# Altium PCB test_board.PcbDoc
Units mm, origin at the board's own origin, x right, y up, seen from the top; angles counter-clockwise.
Board outline 126.47 x 101.7 mm, 2 copper layers (Top Layer, Bottom Layer), stack 1.584 mm thick; 45 components, 45 nets, 223 pads, 4 vias.
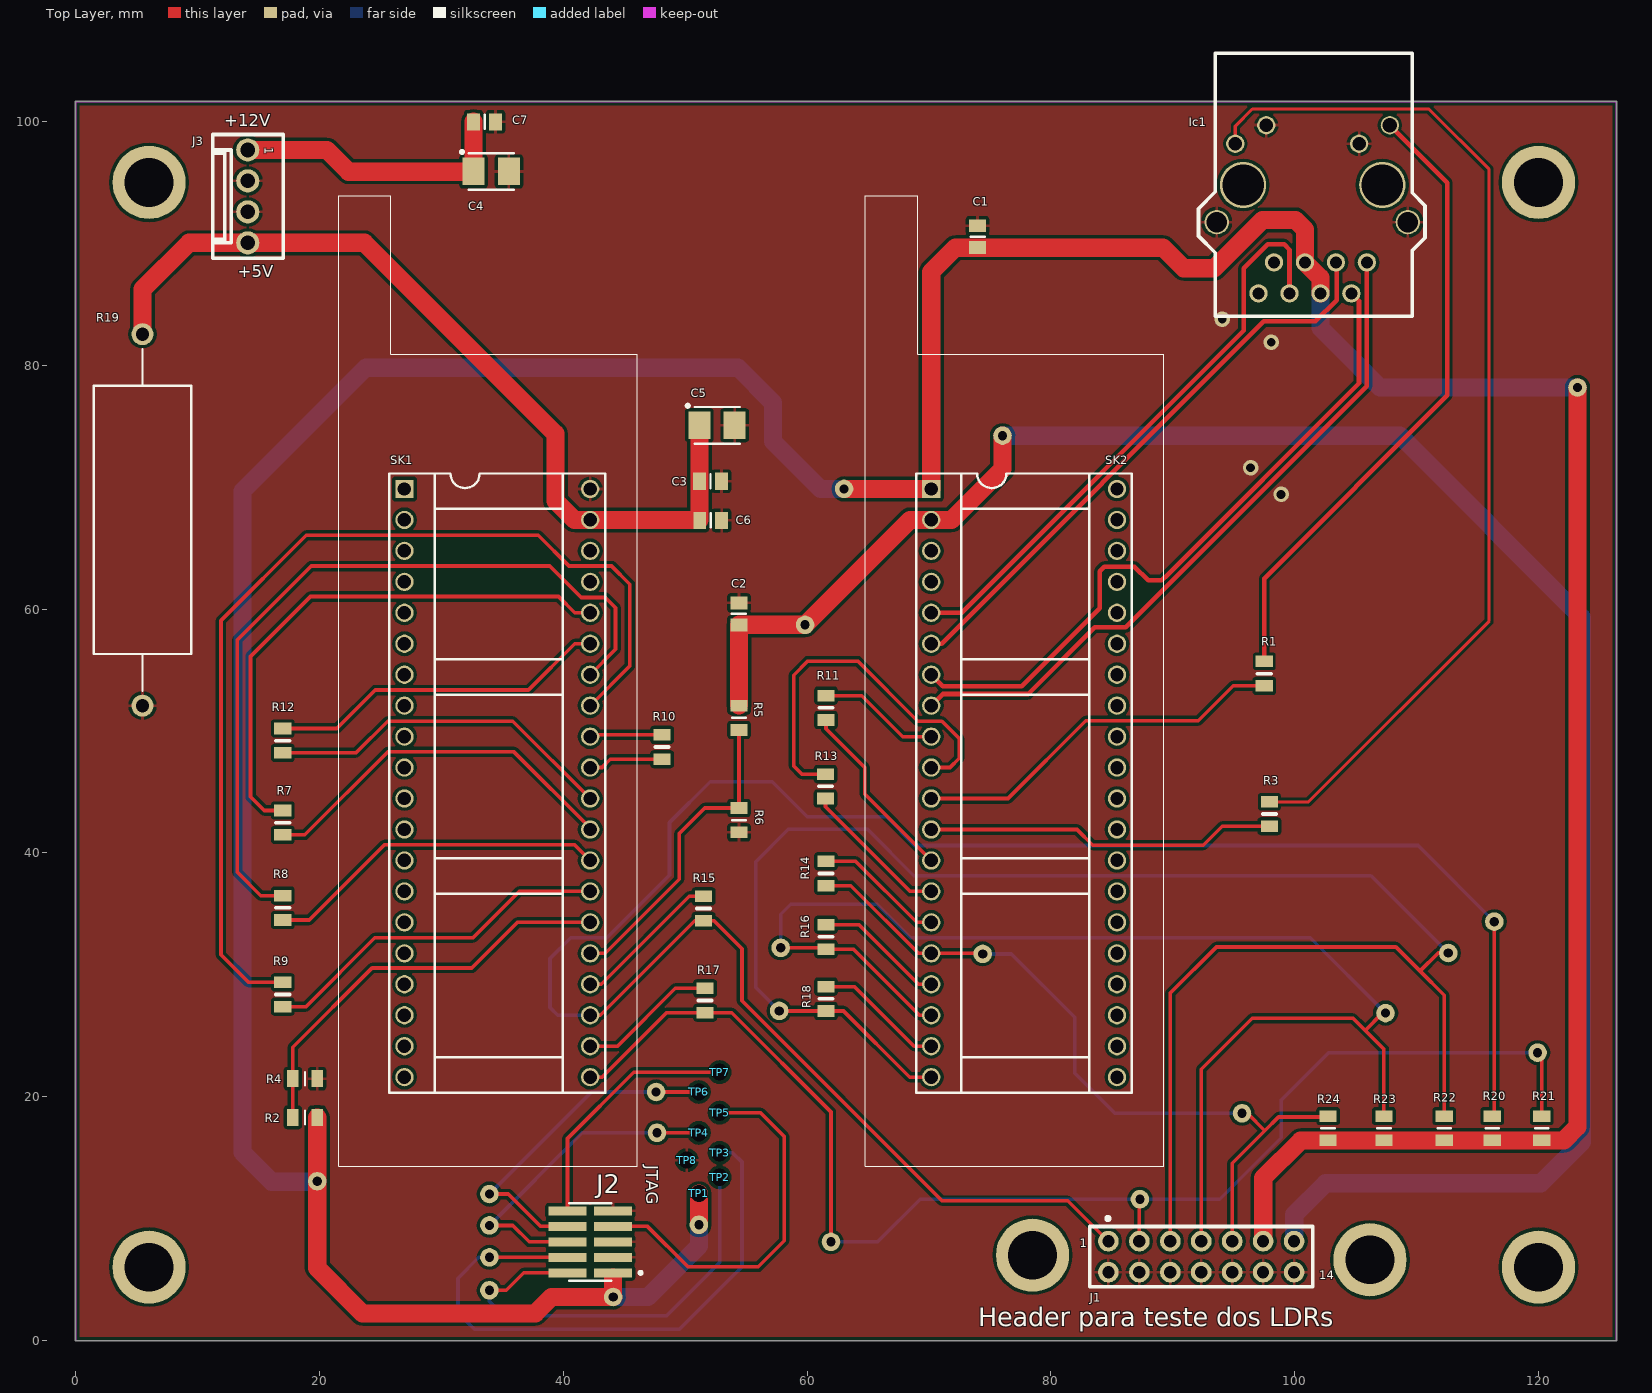
[diagram p0: Top Layer view]
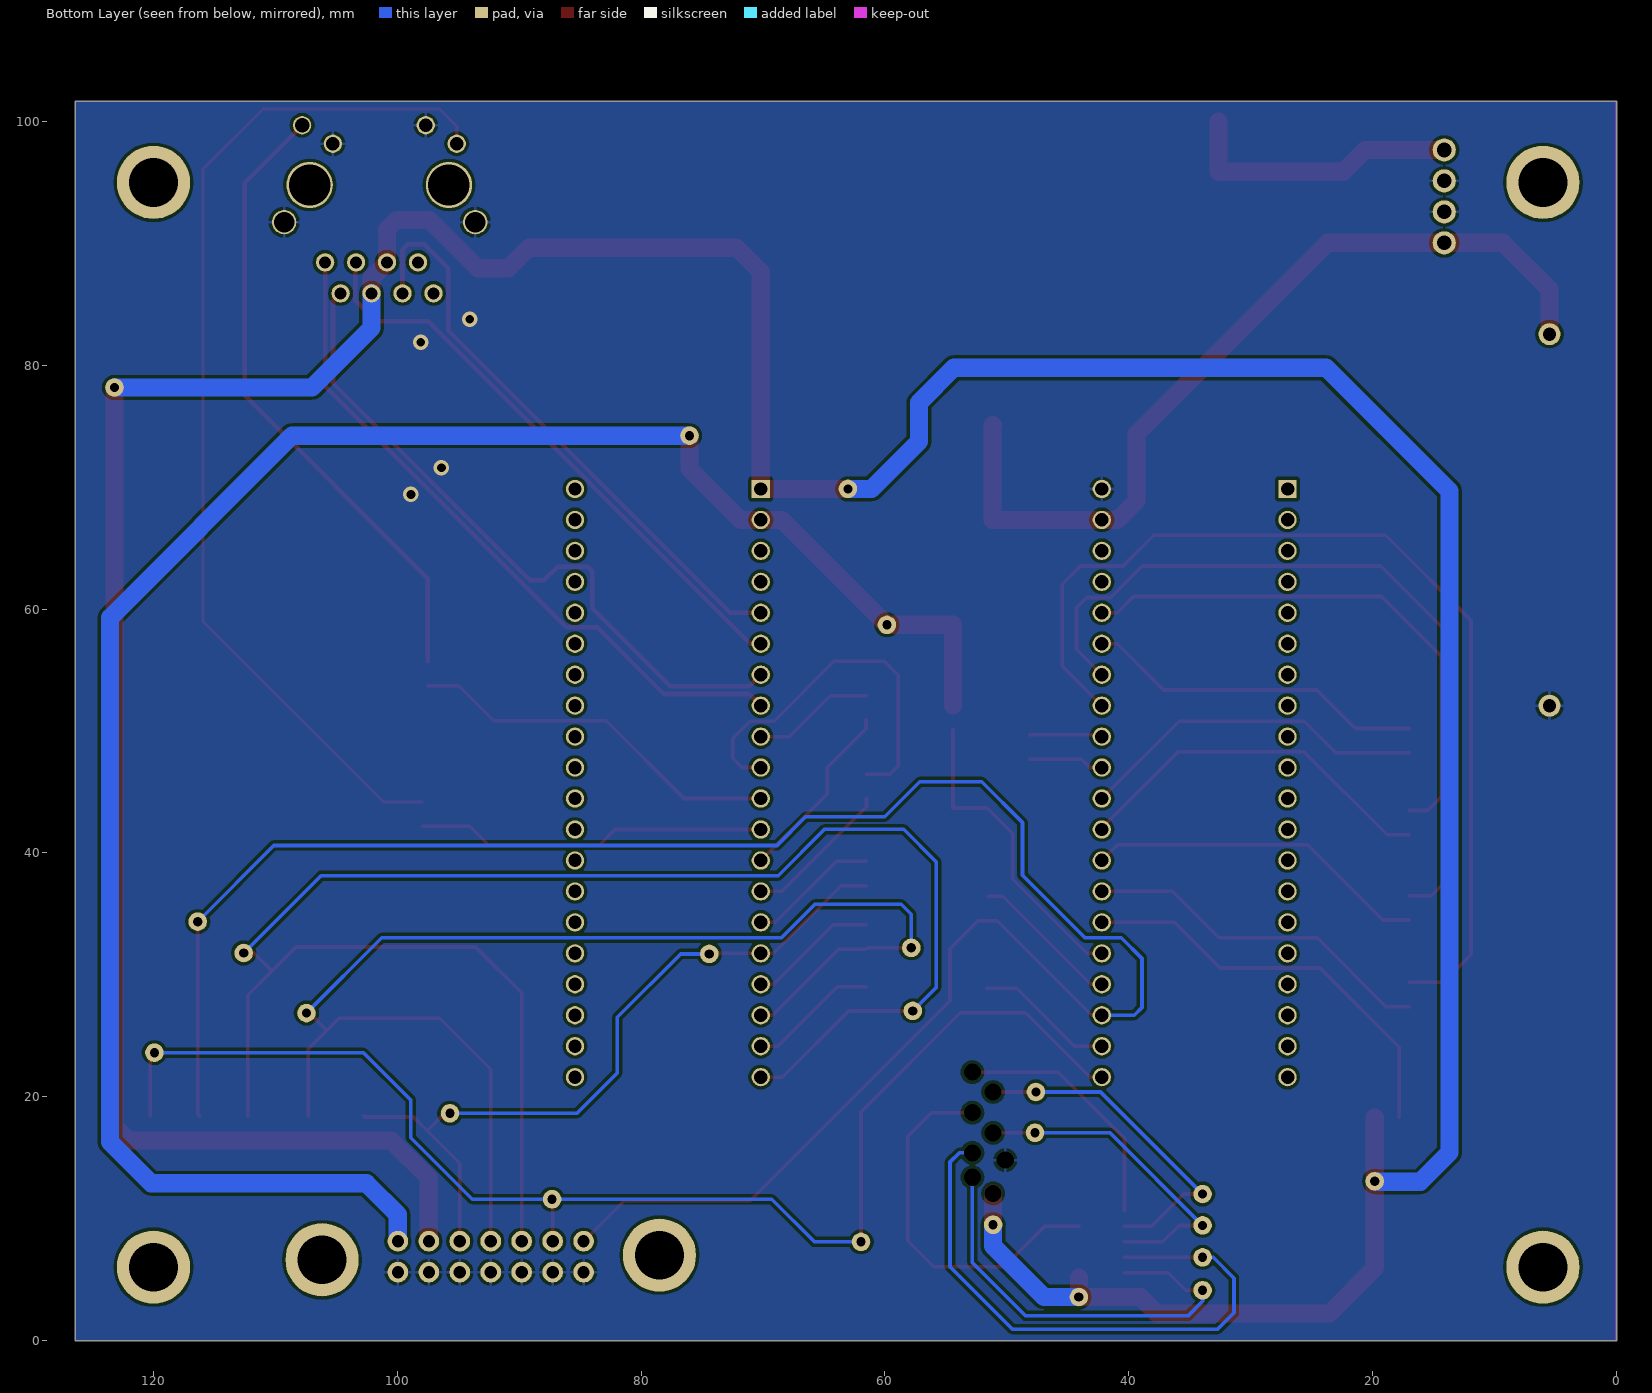
[diagram p1: Bottom Layer view, seen from below]
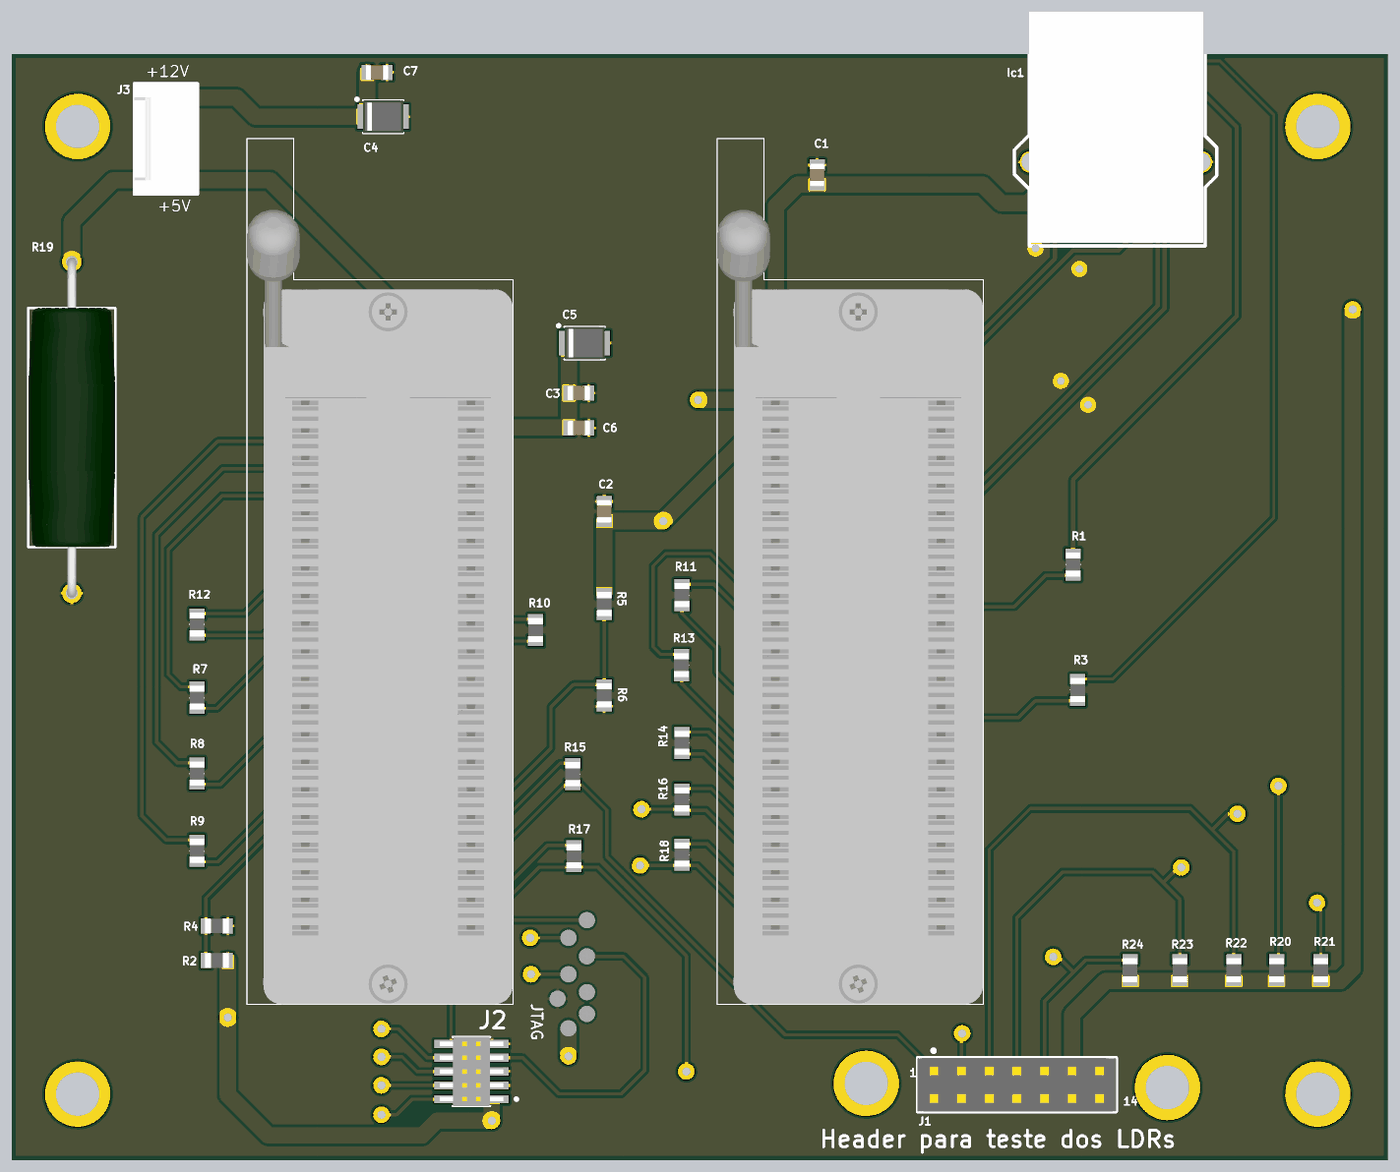
[diagram p2: 3D render of the assembled board from above, using the file's embedded part models]

## Layer stack, top to bottom
Top Solder: solder mask 0.0102, Solder Resist, Dk 3.5
Top Layer: signal copper 0.037
Dielectric 1: core 1.51, FR-4, Dk 4.2
Bottom Layer: signal copper 0.037
Bottom Solder: solder mask 0.0102, Solder Resist, Dk 3.5

## Board outline
-0.05,0 ccw(c0,0) 0,-0.05 126.365,-0.05 ccw(c126.365,0) 126.415,0 126.415,101.6 ccw(c126.365,101.6) 126.365,101.65 0,101.65 ccw(c0,101.6) -0.05,101.6
cut-out: 0,101.6 0,0

## Design rules (kind name [scope] priority, off if disabled: settings)
Clearance [All] p1: gap=0.254 ignorepadtopadclearanceinfootprint=FALSE except(0: Arc-Hole Track-Hole SMDPad-Hole THPad-Hole Via-Hole Fill-Hole Poly-Hole Region-Hole Text-Hole)
HoleSize [All] p1: absolutevalues=TRUE maxlimit=8 minlimit=0.025 maxpercent=80.000 minpercent=20.000
PlaneConnect [All] p1: pad.planeconnectstyle=Relief pad.reliefexpansion=0.508 pad.reliefentries=4 pad.reliefconductorwidth=0.254 pad.reliefairgap=0.254 via.planeconnectstyle=Direct via.reliefexpansion=0.508 via.reliefentries=4 via.reliefconductorwidth=0.254 via.reliefairgap=0.254
PolygonConnect [All] p1: thpad.connectstyle=Relief thpad.reliefconductorwidth=0.254 thpad.reliefentries=4 thpad.polygonreliefangle="90 Angle" thpad.airgapwidth=0.254 smdpad.connectstyle=Relief smdpad.reliefconductorwidth=0.254 smdpad.reliefentries=4 smdpad.polygonreliefangle="90 Angle" smdpad.airgapwidth=0.254 via.connectstyle=Direct via.reliefconductorwidth=0.254 via.reliefentries=4 via.polygonreliefangle="90 Angle" via.airgapwidth=0.254
RoutingVias [All] p1: holewidth=0.711 width=1.27 viastyle="Through Hole" minholewidth=0.711 minwidth=1.27 maxholewidth=0.711 maxwidth=1.27
SilkToSolderMaskClearance [IsPad] p1: minsilkscreentomaskgap=0.1 clearancetoexposedcopper=TRUE
SolderMaskExpansion [All] p1: expansion=0.102
Width [All] p1: maxlimit=4 minlimit=0.254 preferedwidth=0.254 minimp=50.000000 maximp=50.000000 favimp=50.000000
27 further rules are at their usual default settings.

## Components (designator, comment, footprint, x,y, rotation, side; value= is the part's Value field where it differs from the comment)
C1 "10uF" CAPC2012X135N 73.975,90.55 r270 top
C2 "10uF" CAPC2012X135N 54.4,59.6 r270 top
C3 "10uF" CAPC2012X135N 52.067,70.485 r180 top
C4 "47uF" CAPMP3528X210N 34.075,95.9 r0 top
C5 "47uF" CAPMP3528X210N 52.6,75.075 r0 top
C6 "100nF" CAPC2012X135N 52.075,67.275 r180 top
C7 "100nF" CAPC2012X135N 33.525,99.975 r180 top
Ic1 "RJ45" J0006D21BNL 105.918,88.44 r270 top
J1 "Socket 14" SAMTEC_SSW-107-01-G-D 92.329,6.858 r0 top
J2 "Header 10" SAMTEC_FTSH-105-01-L-DV 42.2,8.075 r90 top
J3 "KK®" MOLEX_22-27-2041 14.097,93.853 r270 top
R1 "220" RESC2012X60N 97.5,54.7 r270 top
R2 "1k" RESC2012X60N 18.796,18.288 r180 top
R3 "220" RESC2012X60N 97.925,43.175 r270 top
R4 "1k" RESC2012X60N 18.796,21.463 r180 top
R5 "1k" RESC2012X60N 54.4,51.075 r270 top
R6 "1k" RESC2012X60N 54.4,42.675 r90 top
R7 "1k" RESC2012X60N 16.971,42.468 r90 top
R8 "1k" RESC2012X60N 16.971,35.483 r90 top
R9 "1k" RESC2012X60N 16.971,28.371 r90 top
R10 "1k" RESC2012X60N 48.1,48.675 r90 top
R11 "1k" RESC2012X60N 61.544,51.893 r270 top
R12 "1k" RESC2012X60N 16.971,49.199 r270 top
R13 "1k" RESC2012X60N 61.5,45.45 r90 top
R14 "1k" RESC2012X60N 61.544,38.304 r270 top
R15 "1k" RESC2012X60N 51.5,35.425 r90 top
R16 "1k" RESC2012X60N 61.544,33.097 r270 top
R17 "1k" RESC2012X60N 51.625,27.875 r90 top
R18 "1k" RESC2012X60N 61.544,28.017 r270 top
R19 "5R6" RES_WELWYN_W22 5.461,67.31 r90 top
R20 "330k" RESC2012X60N 116.205,17.399 r90 top
R21 "330k" RESC2012X60N 120.269,17.399 r90 top
R22 "330k" RESC2012X60N 112.268,17.399 r90 top
R23 "330k" RESC2012X60N 107.315,17.399 r90 top
R24 "330k" RESC2012X60N 102.743,17.399 r90 top
SK1 "ZIF40" DIPS_ZIF40 34.574,45.72 r0 top
SK2 "ZIF40" DIPS_ZIF40 77.794,45.72 r0 top
TP1 "Family" P25-3226 51.113,12.05 r180 top
TP2 "Family" P25-3226 52.814,13.375 r180 top
TP3 "Family" P25-3226 52.814,15.375 r180 top
TP4 "Family" P25-3226 51.113,17.025 r180 top
TP5 "Family" P25-3226 52.814,18.675 r180 top
TP6 "Family" P25-3226 51.113,20.375 r180 top
TP7 "Family" P25-3226 52.814,22 r180 top
TP8 "Family" P25-3226 50.114,14.775 r0 top

## Footprints (in the part's own frame and the unit in brackets; to place one, negate y for a bottom-side part, rotate by r counter-clockwise, add the part's x,y. Pads: shape width x height; smd on the part's side, far side on the other; paste and mask are expansions set on the pad)
CAPC2012X135N [mm] "Chip Capacitor, Body 2.0x1.25mm, IPC Medium Density"
  rect 1.05x1.4 smd: 1(-0.9,0) 2(0.9,0)
  silkscreen extent 0,-0.58 0,0.58, body extent -1.05,-0.67 1.05,0.68, height 1.25
CAPMP3528X210N [mm] "Capacitor, Polarized, Molded  Body 3.5x2.8mm, IPC Medium Density"
  rect 1.8x2.25 smd: 1(-1.45,0) 2(1.45,0)
  silkscreen extent -2.52,-1.5 1.85,1.72, body extent -1.85,-1.5 1.85,1.5, height 2.1
DIPS_ZIF40 [mm] "DIP Socket ZIF 40 Leads, Row Spacing 15.24mm; Pitch 2.54mm"
  rect 1.5x1.5 hole 1.1: 1(-7.62,24.13)
  round 1.5 hole 1.1: 2(-7.62,21.59) 3(-7.62,19.05) 4(-7.62,16.51) 5(-7.62,13.97) 6(-7.62,11.43) 7(-7.62,8.89) 8(-7.62,6.35) 9(-7.62,3.81) 10(-7.62,1.27) 11(-7.62,-1.27) 12(-7.62,-3.81) 13(-7.62,-6.35) 14(-7.62,-8.89) 15(-7.62,-11.43) 16(-7.62,-13.97) 17(-7.62,-16.51) 18(-7.62,-19.05) 19(-7.62,-21.59) 20(-7.62,-24.13) 21(7.62,-24.13) 22(7.62,-21.59) 23(7.62,-19.05) 24(7.62,-16.51) 25(7.62,-13.97) 26(7.62,-11.43) 27(7.62,-8.89) 28(7.62,-6.35) 29(7.62,-3.81) 30(7.62,-1.27) 31(7.62,1.27) 32(7.62,3.81) 33(7.62,6.35) 34(7.62,8.89) 35(7.62,11.43) 36(7.62,13.97) 37(7.62,16.51) 38(7.62,19.05) 39(7.62,21.59) 40(7.62,24.13)
  silkscreen extent -13.01,-31.45 11.46,48.17, body extent -13.01,-31.45 11.46,41.64, height 21.37
J0006D21BNL [mm]
  round 1.5 hole 1: 1(0,0) 2(2.54,-1.27) 3(0,-2.54) 4(2.54,-3.81) 5(0,-5.08) 6(2.54,-6.35) 7(0,-7.62) 8(2.54,-8.89)
  round 1.5 hole 1.2: 9(-11.25,1.884)
  round 1.5 hole 1.1: 10(-9.731,-0.635) 11(-11.25,-8.255) 12(-9.731,-10.795)
  round 2 hole 1.7: 13(-3.301,3.365) 14(-3.301,-12.316)
  round 3.8 hole 3.4: 15(-6.35,1.27) 16(-6.35,-10.16)
  silkscreen extent -17.15,-13.82 4.43,4.78, body extent -17.15,-12.47 4.15,3.52, height 13
MOLEX_22-27-2041 [mm] "2.54mm (.100\") Pitch KK® Header, Single Row, Vertical, 4 Circuits"
  round 1.9 hole 1.2: 1(-3.81,0) 2(-1.27,0) 3(1.27,0) 4(3.81,0)
  silkscreen extent -5.08,-2.88 5.08,2.92, body extent -5.08,-2.88 5.08,2.92, height 11.7
P25-3226 [mm] "Probe For 2.54mm Pitch, Serrated Head"
  round 0.5 hole 1.4: H1(0,0)
  body extent -0.75,-0.75 0.75,0.75, height 20.85
RES_WELWYN_W22 [mm] "Resistor, Axial, Leads spacing 30.48mm, Lead Dia. 0.8, Body Lengh 22mm, Diameter 8mm"
  round 1.8 hole 1.1: 1(-15.24,0) 2(15.24,0)
  silkscreen extent -14,-4 14,4, body extent -15.64,-4 15.64,4, height 8
RESC2012X60N [mm] "Chip Resistor, EIA 0805, Metric 2012, Body 2.0x1.2mm, IPC Medium Density"
  rect 0.95x1.4 smd: 1(-1,0) 2(1,0)
  silkscreen extent 0,-0.55 0,0.55, body extent -1.1,-0.67 1.1,0.68, height 0.6
SAMTEC_FTSH-105-01-L-DV [mm] "10 Contacts - Pitch 1.27mm - Dual Row, Vertical, Surface Mount Terminal Strip"
  rect 0.74x3.125 smd: 1(-2.54,-1.868) 2(-2.54,1.868) 3(-1.27,-1.868) 4(-1.27,1.868) 5(0,-1.868) 6(0,1.868) 7(1.27,-1.868) 8(1.27,1.868) 9(2.54,-1.868) 10(2.54,1.868)
  silkscreen extent -3.18,-4.25 3.18,1.71, body extent -3.18,-2.92 3.17,2.92, height 5.96
SAMTEC_SSW-107-01-G-D [mm] "14 Contacts - Pitch 2.54mm - Double Row Through Mount Straight Socket (Lead Length 2.64mm)"
  round 1.7 hole 1: 1(-7.62,1.27) 2(-7.62,-1.27) 3(-5.08,1.27) 4(-5.08,-1.27) 5(-2.54,1.27) 6(-2.54,-1.27) 7(0,1.27) 8(0,-1.27) 9(2.54,1.27) 10(2.54,-1.27) 11(5.08,1.27) 12(5.08,-1.27) 13(7.62,1.27) 14(7.62,-1.27)
  silkscreen extent -9.14,-2.48 9.14,3.28, body extent -9.14,-2.48 9.14,2.48, height 8.51

## Part data
C1 C2 C3: library part CC0805_10UF_10V_10%_X7R, "Non-polarised capacitor", Case=0805, Manufacturer=GENERIC, Manufacturer1 ComponentHeight=1.35mm, Manufacturer1 Example=MURATA, Manufacturer1 Part Number=GRM21BR71A106KE51L, Tolerance=±10%, Voltage=10V, Author="CERN DEM JLC", Component Type=Standard, CreateDate=30/04/2012, HelpURL=\\cern.ch\dfs\Applications\Altium\Datasheets\CC0805_X7R_MURATA.pdf, LatestRevisionDate=30/04/2012, Manufacturer Part Number=CC0805_10UF_10V_10%_X7R, Mounted=Yes, Part Description="SMD Multilayer Chip Ceramic Capacitor", Part Number=CC0805_10UF_10V_10%_X7R, Pin Count=2, Sense=No, SMD=Yes, Socket=No, Status=Preferred, TC=X7R
C4 C5: library part CTE3528-21_47UF_6.3V_10%_LESR0250, "Polarised capacitor", Case=B, Manufacturer=GENERIC, Manufacturer1 ComponentHeight=2.1mm, Manufacturer1 Example=AVX, Manufacturer1 Part Number=TPSB476K006R0250, Tolerance=±10%, Voltage=6.3V, Author="CERN DEM JLC", Component Type=Standard, CreateDate=05/05/2008, HelpURL=\\cern.ch\dfs\Applications\Altium\Datasheets\CTE-LESR_AVX_TPS.pdf, LatestRevisionDate=20/01/2009, Manufacturer Part Number=CTE3528-21_47UF_6.3V_10%_LESR0250, Mounted=Yes, Part Description="Low ESR 0R25 Solid Tantalum Chip Capacitor", Part Number=CTE3528-21_47UF_6.3V_10%_LESR0250, Pin Count=2, Sense=No, SMD=Yes, Socket=No, Status=Preferred
C6 C7: library part CC0805_100NF_50V_10%_X7R, "Non-polarised capacitor", Case=0805, Manufacturer=GENERIC, Manufacturer1 ComponentHeight=1mm, Manufacturer1 Example=TDK, Manufacturer1 Part Number=C2012X7R1H104K085AA, Tolerance=±10%, Voltage=50V, Author="CERN DEM JLC", Component Type=Standard, CreateDate=03/12/2007, HelpURL=\\cern.ch\dfs\Applications\Altium\Datasheets\CC0805_X7R_TDK_C.pdf, LatestRevisionDate=22/04/2015, Manufacturer Part Number=CC0805_100NF_50V_10%_X7R, Mounted=Yes, Part Description="SMD Multilayer Chip Ceramic Capacitor", Part Number=CC0805_100NF_50V_10%_X7R, Pin Count=2, Sense=No, SMD=Yes, Socket=No, Status=Preferred, TC=X7R
Ic1: library part J0006D21BNL, "CONN MAGJACK 1PORT 100 BASE-TX", LED Color="Green - Yellow", Manufacturer="Pulse Electronics Corporation", Operating Temperature="0°C ~ 70°C", Applications="10/100 Base-TX, AutoMDIX", Author="LNLS DIG FCS", Category="Connectors, Interconnects", ComponentHeight=13.84mm, ComponentLink1Description=http://productfinder.pulseeng.com/products/datasheets/J403.pdf, ComponentLink1URL=http://productfinder.pulseeng.com/products/datasheets/J403.pdf, Component Type=Standard, Connector Type=RJ45, Contact Finish=Gold, Contact Finish Thickness="15µin (0.38µm)", Contact Material="Phosphor Bronze", CreateDate=28/06/2016, Family=RJ45, Features="Board Guide", Height Above Board="0.545\" (13.84mm)", HelpURL=http://productfinder.pulseeng.com/products/datasheets/J403.pdf, Housing Material=Thermoplastic, LatestRevisionDate=28/06/2016, Manufacturer Part Number=J0006D21BNL, Mounted=Yes, Mounting Type="Through Hole", Number of Cores per Jack=4, Number of Ports=1, Number of Rows=1, Orientation="90° Angle (Right)", Packaging=Bulk, Part Description="1 Port, 1x1 Tab-Down 10/100BASE-TX RJ45 FastJack Connector Module With LEDs Y/G", Part Number=J0006D21BNL, Pin Count=16, PressFit=No, Pricing 1="1=6.38, 25=5.586, 50=5.32, 100=5.054, 250=4.522, 500=4.256, 1000=3.724, 2500=3.5378, 5000=3.458 (USD)", RoHS="RoHS Compliant", Sense=No, Shielding=Shielded, Shield Material=Brass, SMD=No, Socket=No, Status=None, Stock 1=1565, Supplier 1=Digi-Key, Supplier Part Number 1=J0006D21BNL, Tab Direction=Down, Termination=Solder
J1: library part SAMTEC_SSW-107-01-G-D, "Connector 14 Female", Manufacturer=SAMTEC, Manufacturer Part Number=SSW-107-01-G-D, Author="CERN DEM MR", ComponentHeight=8.51mm, Component Type=Standard, CreateDate=10/03/2016, Family="Socket 14", HelpURL=\\cern.ch\dfs\Applications\Altium\Datasheets\SAMTEC_SSW-107-01-G-D.pdf, LatestRevisionDate=10/03/2016, Mounted=Yes, Part Description="14 Contacts - Pitch 2.54mm - Double Row Through Mount Straight Socket (Lead Length 2.64mm)", Part Number=SAMTEC_SSW-107-01-G-D, Pin Count=14, PressFit=No, Sense=No, SMD=No, Socket=No, Status=None
J2: library part SAMTEC_FTSH-105-01-L-DV, "Connector 10 Male", Manufacturer=SAMTEC, Manufacturer Part Number=FTSH-105-01-L-DV, Author="LNLS DIG LOS", ComponentHeight=8.1mm, Component Type=Standard, CreateDate=17/11/2017, Family="Header 10", LatestRevisionDate=17/11/2017, Mounted=Yes, Part Description="10 Contacts, Pitch 1.27mm, Dual Row SMT Micro Header", Part Number=SAMTEC_FTSH-105-01-L-DV, Pin Count=10, PressFit=No, Sense=No, SMD=Yes, Socket=No, Status=None
J3: library part MOLEX_22-27-2041, "Connector 4 Male", Manufacturer=MOLEX, Manufacturer Part Number=22-27-2041, Author="CERN DEM JLC", ComponentHeight=11.7mm, Component Type=Standard, CreateDate=04/12/2008, Family=KK®, HelpURL=\\cern.ch\dfs\Applications\Altium\Datasheets\MOLEX_22-27-2041.pdf, LatestRevisionDate=04/12/2008, Mounted=Yes, Part Description="2.54mm (.100\") Pitch KK® Wire-to-Board Header, Vertical, with Friction Lock, 4 Circuits, Tin (Sn) Plating", Part Number=MOLEX_22-27-2041, Pin Count=4, PressFit=No, Sense=No, SMD=No, Socket=No, Status=None
R1 R3: library part R0805_220R_1%_0.125W_100PPM, "Resistor - 1%", Case=0805, Manufacturer=GENERIC, Manufacturer1 ComponentHeight=0.6mm, Manufacturer1 Example="NIC COMPONENT", Manufacturer1 Part Number=NRC10F2200TRF, Power=0.125W, Tolerance=±1%, Author="CERN DEM JLC", Component Type=Standard, CreateDate=03/12/2007, HelpURL=\\cern.ch\dfs\Applications\Altium\Datasheets\R0805_NIC_NRC.pdf, LatestRevisionDate=13/03/2008, Manufacturer Part Number=R0805_220R_1%_0.125W_100PPM, Mounted=Yes, Part Description="General Purpose Thick Film Chip Resistor", Part Number=R0805_220R_1%_0.125W_100PPM, Pin Count=2, Sense=No, SMD=Yes, Socket=No, Status=Preferred, TC=±100ppm/°C
R2 R4 R5 R6 R7 R8 R9 R10 R11 R12 R13 R14 R15 R16 R17 R18: library part R0805_1K_1%_0.125W_100PPM, "Resistor - 1%", Case=0805, Manufacturer=GENERIC, Manufacturer1 ComponentHeight=0.6mm, Manufacturer1 Example="NIC COMPONENT", Manufacturer1 Part Number=NRC10F1001TRF, Power=0.125W, Tolerance=±1%, Author="CERN DEM JLC", Component Type=Standard, CreateDate=03/12/2007, HelpURL=\\cern.ch\dfs\Applications\Altium\Datasheets\R0805_NIC_NRC.pdf, LatestRevisionDate=13/03/2008, Manufacturer Part Number=R0805_1K_1%_0.125W_100PPM, Mounted=Yes, Part Description="General Purpose Thick Film Chip Resistor", Part Number=R0805_1K_1%_0.125W_100PPM, Pin Count=2, Sense=No, SMD=Yes, Socket=No, Status=Preferred, TC=±100ppm/°C
R19: library part RWW_5R6_5%_7W_75PPM_WELWYN_W22, "Resistor - 5%", Case="LS30.48 L22 x D8", Manufacturer="TT WELWYN", Manufacturer Part Number=W22-5R6JI, Power=7W, Tolerance=±5%, Author="CERN DEM JLC", ComponentHeight=8mm, Component Type=Standard, CreateDate=29/05/2013, HelpURL=\\cern.ch\dfs\Applications\Altium\Datasheets\RWW_WELWYN_W22.pdf, LatestRevisionDate=29/05/2013, Mounted=Yes, Part Description="Vitreous Enamelled Wirewound Resistor", Part Number=RWW_5R6_5%_7W_75PPM_WELWYN_W22, Pin Count=2, Sense=No, SMD=No, Socket=No, Status=None, TC=±75ppm/°C
R20 R21 R22 R23 R24: library part R0805_330K_1%_0.125W_100PPM, "Resistor - 1%", Case=0805, Manufacturer=GENERIC, Manufacturer1 ComponentHeight=0.6mm, Manufacturer1 Example="NIC COMPONENT", Manufacturer1 Part Number=NRC10F3303TRF, Power=0.125W, Tolerance=±1%, Author="CERN DEM JLC", Component Type=Standard, CreateDate=03/12/2007, HelpURL=\\cern.ch\dfs\Applications\Altium\Datasheets\R0805_NIC_NRC.pdf, LatestRevisionDate=13/03/2008, Manufacturer Part Number=R0805_330K_1%_0.125W_100PPM, Mounted=Yes, Part Description="General Purpose Thick Film Chip Resistor", Part Number=R0805_330K_1%_0.125W_100PPM, Pin Count=2, Sense=No, SMD=Yes, Socket=No, Status=Preferred, TC=±100ppm/°C
SK1 SK2: library part 240-1280-00-0602J, "DIL Socket 40 Leads", Manufacturer=3M, Author="LNLS DIG LOS", ComponentHeight=11.9mm, Component Type=Standard, CreateDate=19/02/2018, Device=ZIF40, LatestRevisionDate=19/02/2018, Manufacturer Part Number=240-1280-00-0602J, Mounted=Yes, PackageDescription="DIP Socket ZIF 40 Leads, Row Spacing 15.24mm; Pitch 2.54mm", Part Description="Connector IC DIP Socket ZIF 40POS, Row Spacing 15.24 mm; Pitch 2.54 mm", Part Number=240-1280-00-0602J, Pin Count=40, PressFit=Yes, Sense=No, SMD=No, Socket=No
TP1 TP2 TP3 TP4 TP5 TP6 TP7 TP8: library part HARWIN_P25-3226, "Probe 2.54mm Crown", Manufacturer=HARWIN, Manufacturer Part Number=P25-3226, Author="LNLS DIG LOS", ComponentHeight=33.3mm, Component Type=Standard, CreateDate=02/03/2018, LatestRevisionDate=05/03/2018, Mounted=Yes, Part Description="Probe For 2.54mm Pitch, Serrated Head", Part Number=HARWIN_P25-3226, Pin Count=1, PressFit=No, Sense=No, SMD=No, Socket=No, Status=None

## Free pads (board coordinates)
  round 6 hole 4: 1(78.486,6.985) 2(106.172,6.604) 3(120,6) 4(120,95) 5(6,95) 6(6,6)
  round 1.524 hole 0.762: 12(44.075,3.55) 12(51.113,9.475) 12(57.7,27.025) 12(57.825,32.2) 12(61.95,8.075) 12(74.4,31.7) 12(87.3,11.575) 12(95.675,18.625) 12(107.45,26.85) 12(112.6,31.775) 12(116.375,34.35) 12(119.925,23.6) 20(19.8,13.05) 20(63.025,69.85) 20(123.2,78.175) 25(59.825,58.7) 25(76.025,74.225) 26(33.925,12) 26(47.6,20.375) 27(33.925,9.425) 27(47.675,17.025) 28(33.925,6.805) 29(33.925,4.1)

## Via types
v1: diameter 1.27, hole 0.711, Top Layer to Bottom Layer, 4 vias

## Nets (pads, with @x,y where several pads share a name; then routed paths per layer and width w, separated by ;. In a path a pad name is that pad's centre, name@x,y a point inside that pad or via, vN(x,y) a via of type N, cw(c..) or ccw(c..) an arc to the next point about the centre after c; other vN are vias at no path point)
+3V3: C1.2 Ic1.4 Ic1.5 J1.11 J2.1 pad.12@44.075,3.55 pad.12@51.113,9.475 pad.20 R2.1 R20.1 R21.1 R22.1 R23.1 R24.1 SK2.1 TP1.H1 | length 358.5
  Top Layer w1.5: R2.1 19.796,13.054 19.8,13.05 19.8,5.925 23.525,2.2 37.675,2.2 39.025,3.55 44.075,3.55 44.068,3.557 44.068,5.125 ; pad.12@51.113,9.475 TP1.H1 ; pad.20@63.025,69.85 SK2.1 70.174,87.649 72.175,89.65 C1.2 89.2,89.65 90.9,87.95 93.375,87.95 97.35,91.925 100.05,91.925 100.838,91.137 Ic1.5 102.108,87.17 Ic1.4 ; J1.11 97.409,13.309 100.499,16.399 R24.1 R23.1 R22.1 R20.1 R21.1 122.074,16.399 123.2,17.525 pad.20@123.2,78.175
  Bottom Layer w1.5: pad.20@19.8,13.05 19.75,13 16.075,13 13.675,15.4 13.675,69.675 23.8,79.8 54.325,79.8 57.2,76.925 57.2,73.75 61.1,69.85 pad.20@63.025,69.85 ; pad.12@44.075,3.55 46.925,3.55 51.113,7.738 pad.12@51.113,9.475 ; Ic1.4 102.108,83.067 107,78.175 pad.20@123.2,78.175
+5V: C2.2 J1.13 pad.25 R5.1 SK2.2 | length 161.3
  Top Layer w1.5: R5.1 C2.2 59.825,58.7 68.435,67.31 SK2.2 71.835,67.31 76.025,71.5 pad.25@76.025,74.225
  Bottom Layer w1.5: pad.25@76.025,74.225 108.625,74.225 123.575,59.275 123.575,16.275 120.175,12.875 102.525,12.875 99.949,10.299 J1.13
+12V: C4.1 C7.2 J3.1 | length 29.8
  Top Layer w1.5: C4.1@32.625,95.885 22.366,95.885 20.588,97.663 ; C4.1 C7.2 ; 20.588,97.663 J3.1 20.588,97.663
GND: C1.1 C2.1 C3.1 C4.2 C5.2 C6.1 C7.1 Ic1.10 Ic1.11 Ic1.13 Ic1.14 J1.2 J1.4 J1.6 J1.8 J1.10 J1.12 J1.14 J2.3 J2.5 J2.9 J3.2 J3.3 R4.1 R6.1 R19.1 SK1.40 TP8.H1
  other v1: 98.875,69.4 96.375,71.6 98.075,81.9 94.05,83.775
LDR1: J1.1 pad.12@116.375,34.35 R15.1 R20.2 SK1.23 | length 173.5
  Top Layer w0.3: SK1.23 43.02,26.67 50.775,34.425 R15.1 52.35,34.425 54.65,32.125 54.65,27.85 71.05,11.45 81.387,11.45 J1.1 ; R20.2 116.375,18.569 pad.12@116.375,34.35
  Bottom Layer w0.3: SK1.23 39.53,26.67 38.9,27.3 38.9,31.325 40.6,33.025 43.575,33.025 48.7,38.15 48.7,42.475 52.05,45.825 57.125,45.825 60,42.95 66.5,42.95 68.85,40.6 110.125,40.6 pad.12@116.375,34.35
LDR2: J1.3 pad.12@61.95,8.075 pad.12@87.3,11.575 pad.12@119.925,23.6 R17.1 R21.2 SK1.21 | length 111
  Top Layer w0.3: SK1.21 43.165,21.59 48.45,26.875 R17.1 53.8,26.875 61.95,18.725 pad.12@61.95,8.075 ; J1.3 87.249,11.524 pad.12@87.3,11.575 ; pad.12@119.925,23.6 120.269,23.256 R21.2
  Bottom Layer w0.3: pad.12@61.95,8.075 65.775,8.075 69.275,11.575 87.3,11.575 93.85,11.575 98.9,16.625 98.9,19.725 102.775,23.6 pad.12@119.925,23.6
LDR3: J1.5 pad.12@57.7,27.025 pad.12@112.6,31.775 R18.2 R22.2 SK2.20 | length 148.8
  Top Layer w0.3: pad.12@57.7,27.025 57.708,27.017 R18.2 62.983,27.017 68.41,21.59 SK2.20 ; J1.5 89.789,28.489 93.575,32.275 108.3,32.275 110.284,30.291 ; R22.2 112.268,28.307 110.284,30.291 ; pad.12@112.6,31.775 111.768,31.775 110.284,30.291
  Bottom Layer w0.3: pad.12@57.7,27.025 55.775,28.95 55.775,39.25 58.45,41.925 64.95,41.925 68.75,38.125 106.25,38.125 pad.12@112.6,31.775
LDR4: J1.7 pad.12@57.825,32.2 pad.12@107.45,26.85 R16.2 R23.2 SK2.18 | length 110.7
  Top Layer w0.3: pad.12@57.825,32.2 61.441,32.2 R16.2 63.778,32.097 69.205,26.67 SK2.18 ; J1.7 92.329,22.229 96.525,26.425 104.775,26.425 105.775,25.425 ; R23.2 107.315,23.885 105.775,25.425 ; pad.12@107.45,26.85 107.2,26.85 105.775,25.425
  Bottom Layer w0.3: pad.12@57.825,32.2 57.825,34.95 58.65,35.775 65.725,35.775 68.475,33.025 101.275,33.025 pad.12@107.45,26.85
LDR5: J1.9 pad.12@74.4,31.7 pad.12@95.675,18.625 R14.2 R24.2 SK2.16 | length 62.9
  Top Layer w0.3: R14.2 63.571,37.304 69.125,31.75 SK2.16 74.35,31.75 pad.12@74.4,31.7 ; J1.9 94.869,14.519 97.55,17.2 ; pad.12@95.675,18.625 96.125,18.625 97.55,17.2 ; R24.2 102.669,18.325 98.675,18.325 97.55,17.2
  Bottom Layer w0.3: pad.12@74.4,31.7 76.75,31.7 81.95,26.5 81.95,21.925 85.25,18.625 pad.12@95.675,18.625
NetIc1_1: Ic1.1 SK2.8 | length 56.8
  Top Layer w0.381: SK2.8 71.126,53.023 78.113,53.023 83.586,58.496 85.909,58.496 86.144,58.496 105.918,78.27 Ic1.1
NetIc1_2: Ic1.2 SK2.7 | length 56.4
  Top Layer w0.381: SK2.7 71.126,53.657 77.608,53.657 84,60.05 84,63.1 84.375,63.475 86.85,63.475 87.975,62.35 89.1,62.35 89.575,62.825 105.275,78.525 105.275,85.273 Ic1.2 Ic1.2@104.648,86.163
NetIc1_3: Ic1.3 SK2.6 | length 48.1
  Top Layer w0.381: SK2.6 71.048,57.15 84.22,70.321 84.22,70.345 97.475,83.6 101.7,83.6 103.45,85.35 103.45,88.292 Ic1.3@103.302,88.44
NetIc1_6: Ic1.6 SK2.5 | length 48.7
  Top Layer w0.381: SK2.5 72.667,59.69 95.825,82.848 95.825,87.95 97.8,89.925 99.125,89.925 99.568,89.482 Ic1.6
NetIc1_9: Ic1.9 R1.1 | length 52.2
  Top Layer w0.381: R1.1 97.5,62.5 112.525,77.525 112.525,94.967 Ic1.9
NetIc1_12: Ic1.12 R3.1 | length 86.2
  Top Layer w0.254: Ic1.12 95.123,99.623 96.525,101.025 111,101.025 115.95,96.075 115.95,59 101.125,44.175 R3.1
NetR1_2: R1.2 SK2.11 | length 31.2
  Top Layer w0.3: SK2.11 76.475,44.45 82.85,50.825 92.075,50.825 94.95,53.7 R1.2
NetR2_2: R2.2 R4.2 SK1.26 | length 34.4
  Top Layer w0.3: R2.2 R4.2 17.796,24.046 24.3,30.55 32.485,30.55 36.225,34.29 SK1.26
NetR3_2: R3.2 SK2.12 | length 28.9
  Top Layer w0.3: SK2.12 82.14,41.91 83.425,40.625 92.5,40.625 94.05,42.175 R3.2
NetR5_2: R5.2 R6.2 SK1.25 | length 25.7
  Top Layer w0.3: SK1.25 43.425,31.75 49.5,37.825 49.5,41.575 51.6,43.675 R6.2 R5.2
NetR7_1: R7.1 SK1.29 | length 30.7
  Top Layer w0.3: R7.1 18.768,41.468 25.575,48.275 35.947,48.275 42.194,42.028 SK1.29
NetR7_2: R7.2 SK1.36 | length 45.1
  Top Layer w0.3: R7.2 15.457,43.468 14.325,44.6 14.325,56.1 19.25,61.025 39.6,61.025 40.935,59.69 SK1.36
NetR8_1: R8.1 SK1.28 | length 28.3
  Top Layer w0.3: R8.1 19.146,34.483 25.313,40.65 40.914,40.65 SK1.28
NetR8_2: R8.2 SK1.34 | length 64.9
  Top Layer w0.3: R8.2 15.167,36.483 13.25,38.4 13.25,57.475 19.3,63.525 38.875,63.525 41.45,60.95 43.425,60.95 44.275,60.1 44.275,56.691 SK1.34
NetR9_1: R9.1 SK1.27 | length 29.1
  Top Layer w0.3: R9.1 18.871,27.371 24.525,33.025 32.575,33.025 36.38,36.83 SK1.27
NetR9_2: R9.2 SK1.33 | length 82.9
  Top Layer w0.3: R9.2 14.154,29.371 11.9,31.625 11.9,59.05 18.9,66.05 37.925,66.05 40.45,63.525 43.95,63.525 45.45,62.025 45.45,55.326 SK1.33
NetR10_1: R10.1 SK1.31 | length 6.2
  Top Layer w0.3: SK1.31 43.165,46.99 43.85,47.675 R10.1
NetR10_2: R10.2 SK1.32 | length 6
  Top Layer w0.3: SK1.32 42.339,49.675 R10.2
NetR11_2: R11.2 SK2.13 | length 15.1
  Top Layer w0.3: R11.2 61.544,50.181 64.725,47 64.725,44.819 SK2.13
NetR12_1: R12.1 SK1.35 | length 28.1
  Top Layer w0.3: R12.1 18.098,50.199 21.399,50.199 24.55,53.35 37.125,53.35 40.925,57.15 SK1.35
NetR12_2: R12.2 SK1.30 | length 28.9
  Top Layer w0.3: R12.2 22.974,48.199 25.575,50.8 35.844,50.8 SK1.30
NetR13_1: R13.1 SK2.14 | length 12.2
  Top Layer w0.3: R13.1 61.5,43.775 68.445,36.83 SK2.14
NetR14_1: R14.1 SK2.15 | length 10.7
  Top Layer w0.3: R14.1@61.56,39.32 R14.1 63.971,39.304 68.985,34.29 SK2.15
NetR15_2: R15.2 SK1.24 | length 12.3
  Top Layer w0.3: SK1.24 43.11,29.21 50.325,36.425 R15.2
NetR16_1: R16.1 SK2.17 | length 10.7
  Top Layer w0.3: R16.1 64.253,34.097 69.14,29.21 SK2.17
NetR17_2: R17.2 SK1.22 | length 11.4
  Top Layer w0.3: SK1.22 44.43,24.13 49.175,28.875 R17.2
NetR18_1: R18.1 SK2.19 | length 10.7
  Top Layer w0.3: R18.1 63.883,29.017 68.77,24.13 SK2.19
TCK: J2.4 pad.28 TP3.H1 | length 49.2
  Top Layer w0.3: pad.28@34.005,6.805 J2.4
  Bottom Layer w0.3: pad.28 33.055,6.805 31.35,5.1 31.35,2.25 32.7,0.9 49.525,0.9 54.65,6.025 54.65,14.625 53.9,15.375 TP3.H1
TDI: J2.8 pad.26 TP6.H1 | length 28.2
  Top Layer w0.3: pad.26@33.925,12 35.475,12 38.13,9.345 J2.8 ; pad.26@47.6,20.375 TP6.H1
  Bottom Layer w0.3: pad.26@33.925,12 42.3,20.375 pad.26@47.589,20.375
TDO: J2.6 pad.27 TP4.H1 | length 27.3
  Top Layer w0.3: pad.27@33.925,9.425 35.85,9.425 37.2,8.075 J2.6 ; pad.27@47.675,17.025 TP4.H1
  Bottom Layer w0.3: pad.27@33.925,9.425 41.525,17.025 pad.27@47.675,17.025
TGT_D_N: R11.1 SK2.9 | length 10
  Top Layer w0.3: R11.1 64.482,52.893 67.845,49.53 SK2.9
TGT_D_P: R13.2 SK2.10 | length 31.3
  Top Layer w0.3: R13.2 59.575,46.45 58.9,47.125 58.9,54.575 60.05,55.725 64.15,55.725 69.075,50.8 71.05,50.8 72.475,49.375 72.475,47.75 71.715,46.99 SK2.10
TMS: J2.2 pad.29 TP2.H1 | length 36.1
  Top Layer w0.3: pad.29 35.3,4.1 36.735,5.535 J2.2
  Bottom Layer w0.3: pad.29 33.925,3.2 35.125,2 48.425,2 52.814,6.389 TP2.H1
TRST_N: J2.10 TP7.H1 | length 20.7
  Top Layer w0.3: J2.10 40.332,16.557 45.775,22 TP7.H1
USB_RTS: J2.7 TP5.H1 | length 31
  Top Layer w0.3: J2.7 46.905,9.345 50.225,6.025 55.975,6.025 58.125,8.175 58.125,16.725 56.175,18.675 TP5.H1
VIN_+5V: C3.2 C5.1 C6.2 J3.4 R19.2 SK1.39 | length 71.4
  Top Layer w1.5: R19.2 5.461,86.233 9.271,90.043 J3.4 23.682,90.043 39.35,74.375 39.35,68.875 40.915,67.31 SK1.39 51.14,67.31 51.167,67.337 C3.2 51.167,75.058 C5.1
pads on no net: Ic1.7 Ic1.8 Ic1.15 Ic1.16 SK1.1 SK1.2 SK1.3 SK1.4 SK1.5 SK1.6 SK1.7 SK1.8 SK1.9 SK1.10 SK1.11 SK1.12 SK1.13 SK1.14 SK1.15 SK1.16 SK1.17 SK1.18 SK1.19 SK1.20 SK1.37 SK1.38 SK2.3 SK2.4 SK2.21 SK2.22 SK2.23 SK2.24 SK2.25 SK2.26 SK2.27 SK2.28 SK2.29 SK2.30 SK2.31 SK2.32 SK2.33 SK2.34 SK2.35 SK2.36 SK2.37 SK2.38 SK2.39 SK2.40

## Polygon pours and split planes (outlines as drawn)
GND on Top Layer "Top Layer-GND" (solid, remove dead copper, pour order 0): 0,101.6 126.365,101.6 126.365,0 0,0
GND on Bottom Layer "Bottom Layer-GND" (solid, pour order 2): 0,101.6 126.365,101.6 126.365,0 0,0

## Keep-outs
Top Layer:
  lines w0.1: 0,0 126.365,0 126.365,101.6 0,101.6 0,0

## Silkscreen, mask and mechanical layers (free items; w line width, h text height)
Top Overlay:
  text "+12V" at 12.175,99.6 h1
  text "+5V" at 13.275,87.225 h1
  text "JTAG" at 46.775,14.375 h1 r270
  text "Header para teste dos LDRs" at 74.041,1.143 h1.52

## Text inside footprints (layer, text, board x,y; h text height)
J1: Top Overlay "14" at 102.019,5.008 h0.7; Top Overlay "1" at 82.362,7.63 h0.7; Mechanical 14 "14" at 102.019,5.008 h0.7; Mechanical 14 "1" at 82.362,7.63 h0.7
J3: Top Overlay "1" at 15.492,97.873 h0.7 r270; Mechanical 14 "1" at 15.492,97.873 h0.7 r270